# EAGLE board thermostat (EAGLE 7.7.0)
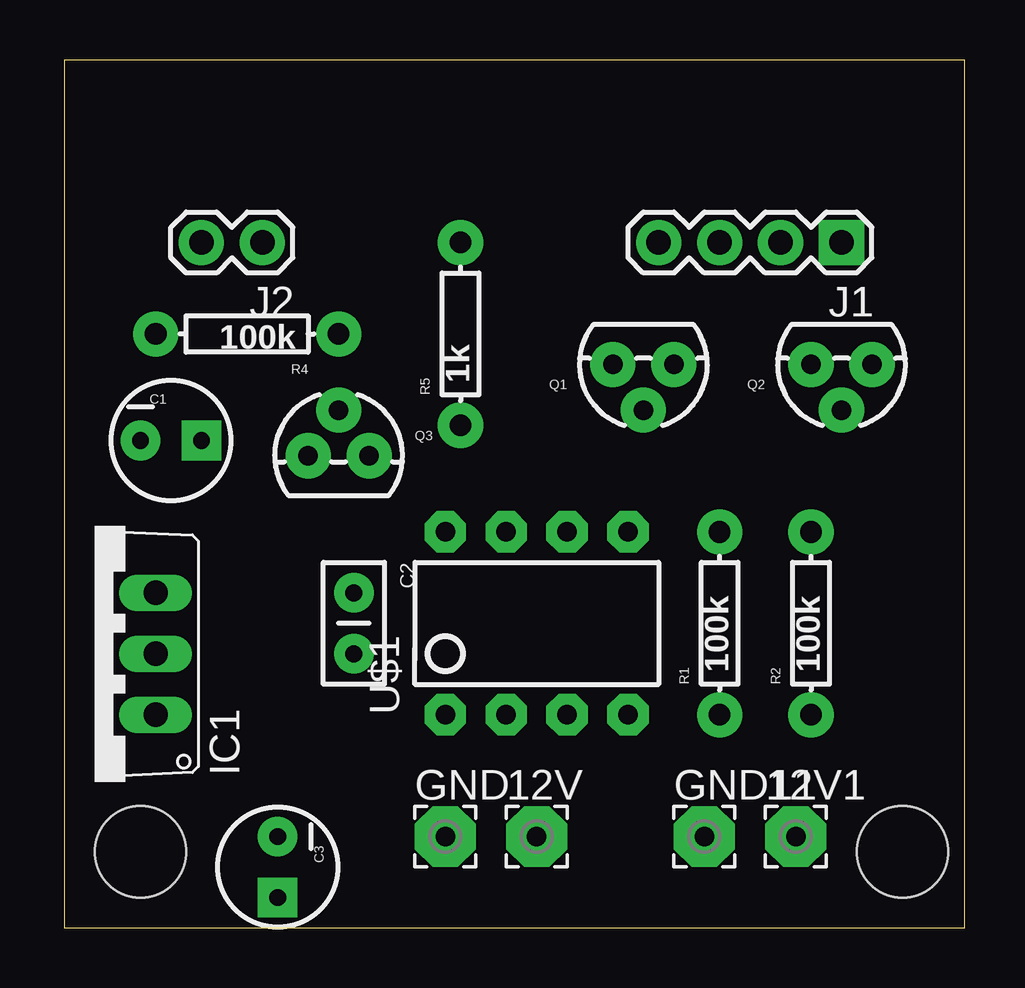
[diagram p0: board, top side]
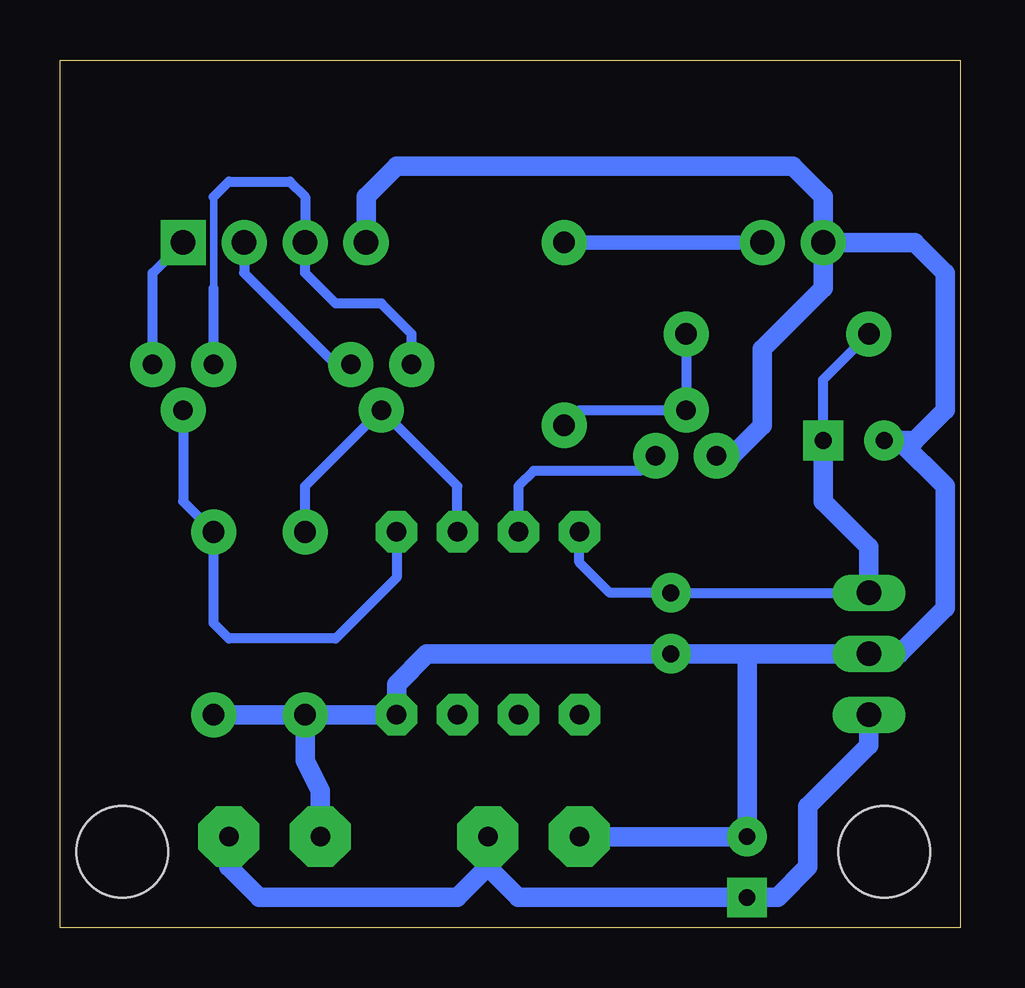
[diagram p1: board, bottom side, seen from below]

Size 37.52 x 36.19 mm. Coordinates in mm from the lower left corner, seen from the top.
Outline: 0,0 37.52,0 37.52,36.19 0,36.19 0,0
Copper layers (1*16): Top 0.035mm / dielectric 1.5mm / Bottom 0.035mm
Design rules "default": minimum track width 10mil, minimum drill 0.6mm, track to track 8mil, track to pad 8mil, pad to pad 8mil, via to via 8mil, smd to smd 8mil, copper to edge 40mil, drill to drill 8mil, minimum pad ring 10mil, minimum via ring 8mil, stop-mask expansion 4mil, vias tented up to drill 0mil, thermal gap 10mil
Holes 3.81 mm at 3.17,3.17 34.92,3.17

## Footprints (pad centres in the part's own frame; a part is rotated, then mirrored left to right if it is on the bottom)
2,54/0,8 = drill 0.813 pad 2.54 octagon: 1 0,0
CPOL-RADIAL-10UF-25V = drill 0.7 pad 1.651 square: 1 1.27,0 | drill 0.7 pad 1.651: 2 -1.27,0
CAP-PTH-SMALLEZ = drill 0.7 pad 1.651: 1 0,0; 2 2.54,0
TO220V = drill 1.016 long: 1 -2.54,-2.54; 2 0,-2.54; 3 2.54,-2.54
1X04 = drill 1.016 pad 1.88 square: 1 0,0 | drill 1.016 pad 1.88: 2 2.54,0; 3 5.08,0; 4 7.62,0
1X02 = drill 1.016 pad 1.88: 1 0,0; 2 2.54,0
TO-92 = drill 0.813 pad 1.88: 1 -1.27,0; 2 0,1.905; 3 1.27,0
AXIAL-0.3 = drill 0.9 pad 1.88: P$1 -3.81,0; P$2 3.81,0
DIP08 = drill 0.813 pad 1.727 octagon: 1 -3.81,-3.81; 2 -1.27,-3.81; 3 1.27,-3.81; 4 3.81,-3.81; 5 3.81,3.81; 6 1.27,3.81; 7 -1.27,3.81; 8 -3.81,3.81

## Placement (x,y rotation side)
12V  [2,54/0,8]  19.68,3.81 0 top
12V1  [2,54/0,8]  30.48,3.81 0 top
C1  10uF  [CPOL-RADIAL-10UF-25V]  4.45,20.32 0 top
C2  0.1uF  [CAP-PTH-SMALLEZ]  12.06,13.97 270 top
C3  0.1uF  [CPOL-RADIAL-10UF-25V]  8.89,2.54 270 top
GND  [2,54/0,8]  15.88,3.81 0 top
GND11  [2,54/0,8]  26.67,3.81 0 top
IC1  7805TV  [TO220V]  1.27,11.43 90 top
J1  [1X04]  32.38,28.57 180 top
J2  [1X02]  8.26,28.57 180 top
Q1  MOSFET-NCHANNEL2N7000  [TO-92]  24.13,23.5 180 top
Q2  MOSFET-NCHANNEL2N7000  [TO-92]  32.38,23.5 180 top
Q3  MOSFET-NCHANNEL2N7000  [TO-92]  11.43,19.68 0 top
R1  100k  [AXIAL-0.3]  27.3,12.7 90 top
R2  100k  [AXIAL-0.3]  31.11,12.7 90 top
R4  100k  [AXIAL-0.3]  7.62,24.77 180 top
R5  1k  [AXIAL-0.3]  16.51,24.77 90 top
U$1  ATTINY13DIP  [DIP08]  19.68,12.7 0 top

## Library data of the parts
12V 12V1 GND GND11 = wirepad
C1-C3 = SparkFun-Capacitors
IC1 = linear
J1 = SparkFun-Connectors; PROD_ID: CONN-09696
J2 = SparkFun-Connectors
Q1-Q3 = SparkFun-DiscreteSemi
R1 R2 R4 R5 = SparkFun-Passives
U$1 = SparkFun-DigitalIC

## Nets
5V: C1.1 C2.1 IC1.3 R4.P$2 U$1.8
12V: 12V1.1 12V.1 C3.1 IC1.1
GND: C1.2 C2.2 C3.2 GND11.1 GND.1 IC1.2 J1.4 J2.2 Q3.1 R1.P$1 R2.P$1 U$1.4
HEAT_OFF: Q2.2 R2.P$2 U$1.5
HEAT_ON: Q1.2 R1.P$2 U$1.6
N$1: Q3.2 R4.P$1 R5.P$1
SENSOR_IN: Q3.3 U$1.7
SW_COMMON: J1.3 Q1.3 Q2.3
SWITCH_OFF: J1.1 Q2.1
SWITCH_ON: J1.2 Q1.1
THERMOSTAT_IN: J2.1 R5.P$2

## Tracks (layer width: path | path; a pad name or v marks a point on that pad's centre or on a via)
5V
  Bottom 0.406: U$1.8 15.88,15.24 14.61,13.97 C2.1 IC1.3 | C1.1 5.71,22.86 R4.P$2
  Bottom 0.813: IC1.3 3.81,15.88 5.71,17.78 C1.1
12V
  Bottom 0.813: 19.68,2.54 18.41,1.27 C3.1 7.62,1.27 6.35,2.54 6.35,5.08 3.81,7.62 IC1.1 | 19.68,2.54 12V.1 | 12V1.1 30.48,2.54 29.21,1.27 20.95,1.27 19.68,2.54
GND
  Bottom 0.813: 8.89,11.43 IC1.2 2.54,11.43 0.64,13.34 0.64,18.41 2.54,20.32 C1.2 1.91,20.32 0.64,21.59 0.64,27.3 1.91,28.57 J2.2 | 8.89,11.43 C2.2 22.23,11.43 23.5,10.16 U$1.4 R1.P$1 | 8.89,11.43 C3.2 GND.1 | R1.P$1 R2.P$1 | J1.4 24.77,30.48 23.5,31.75 6.99,31.75 5.71,30.48 J2.2 | Q3.1 9.53,19.68 8.26,20.95 8.26,24.13 5.71,26.67 J2.2 | GND11.1 26.67,5.71 27.3,6.99 R1.P$1
HEAT_OFF
  Bottom 0.406: Q2.2 32.38,17.78 R2.P$2 31.11,12.7 30.48,12.06 26.04,12.06 23.5,14.61 U$1.5
HEAT_ON
  Bottom 0.406: R1.P$2 27.3,18.41 Q1.2 20.95,18.41 U$1.6
N$1
  Bottom 0.406: R4.P$1 Q3.2 15.88,21.59 R5.P$1
SENSOR_IN
  Bottom 0.406: Q3.3 13.34,19.05 17.78,19.05 18.41,18.41 U$1.7
SW_COMMON
  Bottom 0.305: 31.11,26.67 31.11,30.48
  Bottom 0.406: Q1.3 22.86,24.77 24.13,26.04 26.04,26.04 27.3,27.3 J1.3 27.3,30.48 27.94,31.11 30.48,31.11 31.11,30.48 | Q2.3 31.11,26.67
SWITCH_OFF
  Bottom 0.406: Q2.1 33.66,27.3 J1.1
SWITCH_ON
  Bottom 0.406: J1.2 29.84,27.3 26.04,23.5 Q1.1
THERMOSTAT_IN
  Bottom 0.61: J2.1 R5.P$2